# Altium PCB esc.PcbDoc (part 2 of 3)
Units mm, origin at the board's own origin, x right, y up, seen from the top; angles counter-clockwise.
Board outline 31 x 31 mm, 4 copper layers (Top Layer, Ground, Power, Bottom Layer), stack 0.971 mm thick; 336 components, 195 nets, 854 pads, 360 vias.
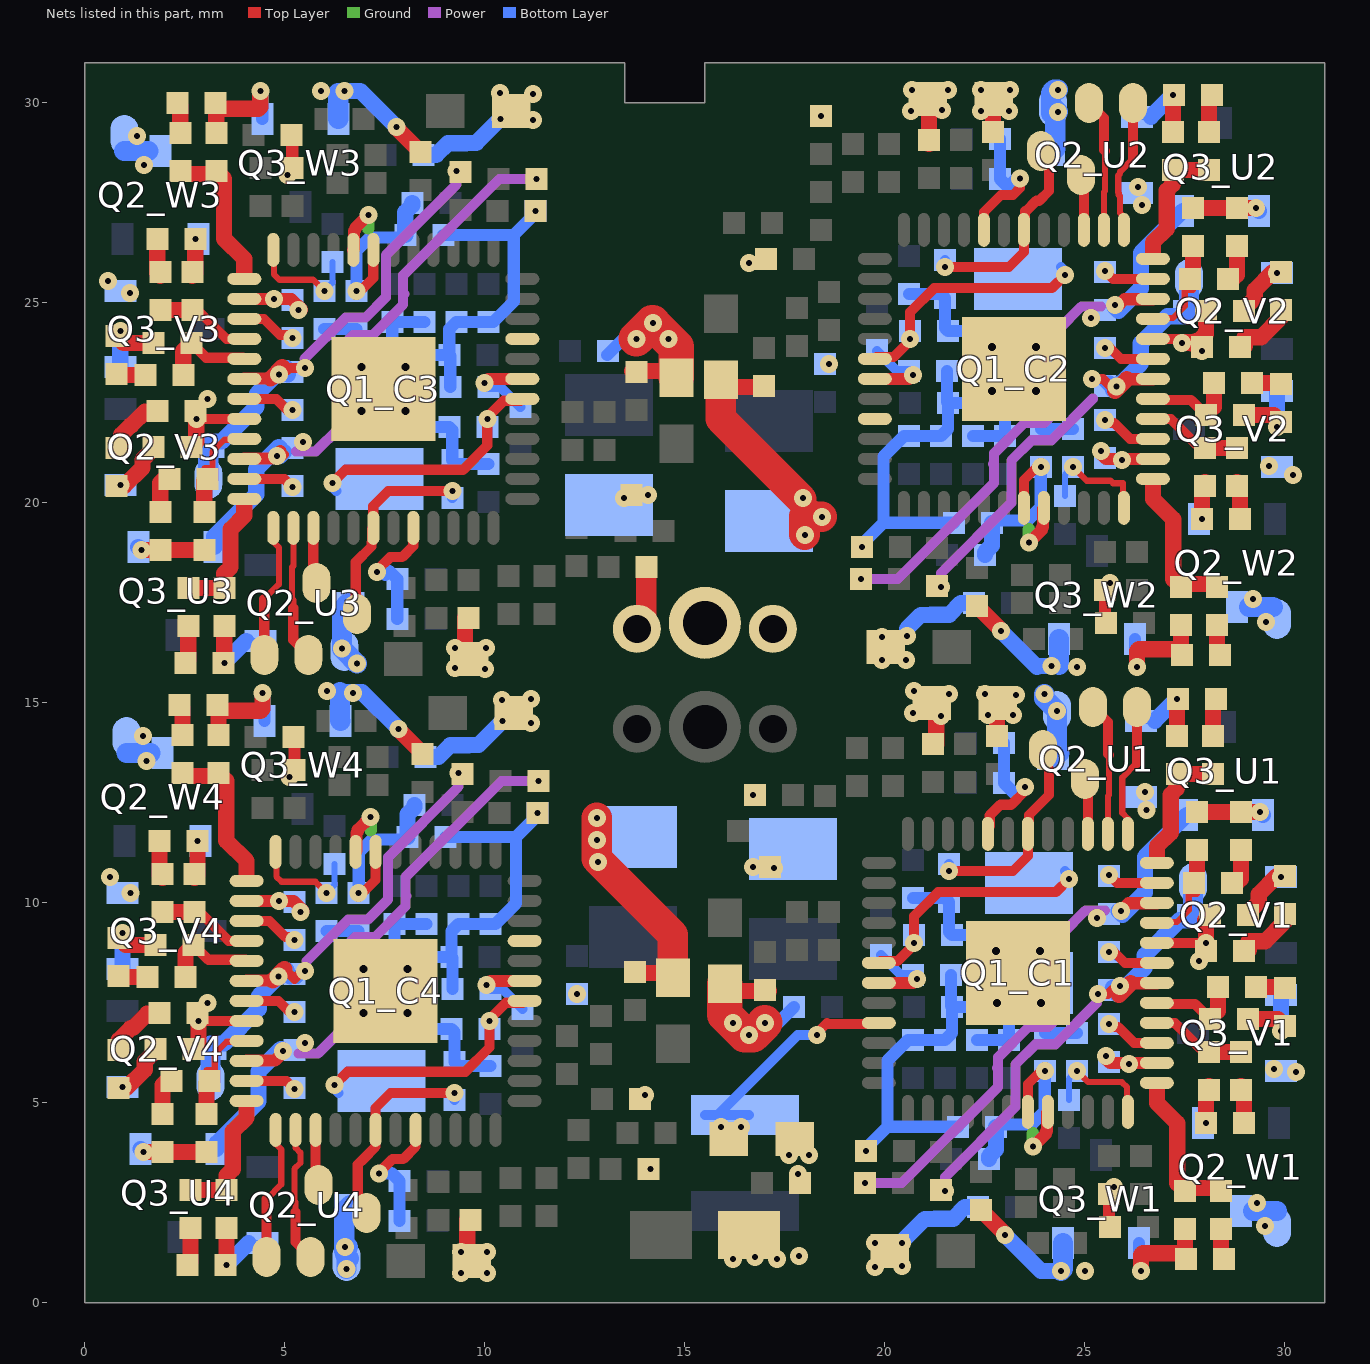
[diagram p4: the nets of this part, all layers, seen from the top]

## Via types
v1: diameter 0.45, hole 0.15, Top Layer to Bottom Layer, tented both sides, 344 vias
v2: diameter 0.5, hole 0.2, Top Layer to Bottom Layer, tented both sides, 12 vias
v3: diameter 0.5, hole 0.2, Top Layer to Bottom Layer, 4 vias

## Nets (pads, with @x,y where several pads share a name; then routed paths per layer and width w, separated by ;. In a path a pad name is that pad's centre, name@x,y a point inside that pad or via, vN(x,y) a via of type N, cw(c..) or ccw(c..) an arc to the next point about the centre after c; other vN are vias at no path point)
GND: C1_C1.1 C1_C2.1 C1_C3.1 C1_C4.1 C2_C1.2 C2_C2.2 C2_C3.2 C2_C4.2 C4_C1.2 C4_C2.2 C4_C3.2 C4_C4.2 C5_C1.1 C5_C2.1 C5_C3.1 C5_C4.1 C6_C1.1 C6_C2.1 C6_C3.1 C6_C4.1 C8_C1.2 C8_C2.2 C8_C3.2 C8_C4.2 C10_C1.2 C10_C2.2 C10_C3.2 C10_C4.2 C11_C1.1 C11_C2.1 C11_C3.1 C11_C4.1 C12_C1.2 C12_C2.2 C12_C3.2 C12_C4.2 C13_C1.2 C13_C2.2 C13_C3.2 C13_C4.2 C14_C1.2 C14_C2.2 C14_C3.2 C14_C4.2 C15_C1.2 C15_C2.2 C15_C3.2 C15_C4.2 C17_U1.2 C17_U2.2 C17_U3.2 C17_U4.2 C17_V1.2 C17_V2.2 C17_V3.2 C17_V4.2 C17_W1.2 C17_W2.2 C17_W3.2 C17_W4.2 C18_U1.1 C18_U2.1 C18_U3.1 C18_U4.1 C18_V1.1 C18_V2.1 C18_V3.1 C18_V4.1 C18_W1.1 C18_W2.1 C18_W3.1 C18_W4.1 C20.2 C21.2 C22.2 C23.1 D3.1 G.1 Q1_C1.20 Q1_C1.44 Q1_C1.EPAD Q1_C2.20 Q1_C2.44 Q1_C2.EPAD Q1_C3.20 Q1_C3.44 Q1_C3.EPAD Q1_C4.20 Q1_C4.44 Q1_C4.EPAD R5_U1.1 R5_U2.1 R5_U3.1 R5_U4.1 R5_V1.1 R5_V2.1 R5_V3.1 R5_V4.1 R5_W1.1 R5_W2.1 R5_W3.1 R5_W4.1 R6_C1.1 R6_C2.1 R6_C3.1 R6_C4.1 R7_C1.1 R7_C2.1 R7_C3.1 R7_C4.1 R10_C1.2 R10_C2.2 R10_C3.2 R10_C4.2 R13_C1.2 R13_C2.2 R13_C3.2 R13_C4.2 R16_C1.1 R16_C2.1 R16_C3.1 R16_C4.1 R19_U1.1 R19_U2.1 R19_U3.1 R19_U4.1 R19_V1.1 R19_V2.1 R19_V3.1 R19_V4.1 R19_W1.1 R19_W2.1 R19_W3.1 R19_W4.1 | length 117.5
  Top Layer w0.254: v1(7.307,18.273) 7.307,18.322 7.63,18.645 7.93,18.645 8.21,18.925 Q1_C3.44@8.21,19.375 ; v1@7.445,3.354 7.687,3.595 7.955,3.595 8.266,3.907 Q1_C4.44@8.266,4.325 ; R19_U3.1@9.503,17.143 R19_U3.1@9.585,17.225 ; R19_U4.1@9.56,2.093 R19_U4.1@9.641,2.175 ; R19_U1.1@21.2,13.875 R19_U1.1@21.282,13.957 ; Q1_C2.44@22.475,26.825 22.475,27.275 22.9,27.7 23.2,27.7 23.378,27.878 v1(23.378,28.108) ; Q1_C1.44@22.575,11.725 22.575,11.875 22.62,11.92 22.62,12.188 22.887,12.455 23.155,12.455 23.5,12.8 v1(23.5,12.9)
  Top Layer w0.305: C18_W3.1@5.16,29.2 5.185,29.175 C17_W3.2@5.185,28.375 ; C18_W4.1@5.216,14.15 5.241,14.125 C17_W4.2@5.241,13.325 ; Q1_C3.20@6.71,26.325 6.729,26.345 6.729,26.799 6.765,26.834 6.765,26.88 7.081,27.196 7.084,27.192 v1(7.088,27.192) ; Q1_C4.20@6.766,11.275 6.786,11.295 6.786,11.749 6.822,11.784 6.822,11.83 7.137,12.146 7.141,12.142 v1(7.145,12.142) ; G.1@15.4,16.6 G.1@15.6,16.4 ; D3.1@17.75,4.1 D3.1@18.05,3.8 ; v1(23.596,19.008) 23.6,19.008 23.604,19.004 23.92,19.32 23.92,19.366 23.955,19.401 23.955,19.855 Q1_C2.20@23.975,19.875 ; v1(23.696,3.908) 23.7,3.908 23.704,3.904 24.02,4.22 24.02,4.266 24.055,4.301 24.055,4.755 Q1_C1.20@24.075,4.775 ; C17_W2.2@25.5,17.825 25.5,17.025 C18_W2.1@25.525,17 ; C17_W1.2@25.6,2.725 25.6,1.925 C18_W1.1@25.625,1.9
  Top Layer w0.406: R5_U3.1@9.503,16.1 R19_U3.1@9.503,17.143 ; R5_U4.1@9.56,1.05 R19_U4.1@9.56,2.093 ; R19_V3.1@13.685,23.3 R5_V3.1@14.41,23.3 ; R19_V4.1@13.741,8.25 R5_V4.1@14.466,8.25 ; R5_V2.1@16.275,22.9 R19_V2.1@17,22.9 ; R5_V1.1@16.375,7.8 R19_V1.1@17.1,7.8 ; R19_U2.1@21.1,28.975 21.1,29.818 21.182,29.9 R5_U2.1@21.182,30.1 ; R19_U1.1@21.282,13.957 R5_U1.1@21.282,15
  Top Layer w0.508: C21.2@14.035,17.085 C18_V3.1@14.035,18.4
  Top Layer w0.762: v1(12.8,12.125) v1(12.8,11.575) 12.8,11.1 14.7,9.2 R5_V4.1@14.7,8.125 ; R5_V2.1@15.9,23.075 15.9,22.1 v1@17.913,20.087 ; v1(18,19.2) 17.979,19.221 17.979,19.665 18.2,19.675 v1(18.425,19.65)
  Top Layer w0.889: v1(13.785,24.1) 14.185,24.5 v1(14.2,24.5) 14.2,24.485 v1(14.585,24.1) 14.785,23.9 R5_V3.1@14.785,23.125 ; R5_V1.1@16,7.975 16,7.2 v1(16.2,7) 16.5,6.7 v1(16.6,6.7) 16.7,6.7 v1(17,7)
  Ground w0.305: 7.085,26.859 7.088,26.863 v1(7.088,27.192) ; 7.141,11.809 7.145,11.813 v1(7.145,12.142) ; v1(23.596,19.008) 23.596,19.337 23.6,19.341 ; v1(23.696,3.908) 23.696,4.237 23.7,4.241
  Bottom Layer w0.305: C14_C3.2@5.985,24.35 C15_C3.2@6.785,24.35 6.785,23.7 C4_C3.2@6.885,23.6 ; C14_C4.2@6.041,9.3 C15_C4.2@6.841,9.3 6.841,8.65 C4_C4.2@6.941,8.55 ; v1(7.307,18.273) 7.372,18.338 7.51,18.2 7.61,18.3 C17_U3.2@7.81,18.1 C18_U3.1@7.81,17.1 ; v1(7.35,3.241) 7.658,3.241 7.666,3.25 C17_U4.2@7.866,3.05 C18_U4.1@7.866,2.05 ; v2(8.01,22.3) 8.41,21.9 C6_C3.1@9.11,21.9 9.185,21.825 R7_C3.1@9.185,21.075 9.285,20.975 C1_C3.1@10.085,20.975 ; v2(8.066,7.25) 8.466,6.85 C6_C4.1@9.166,6.85 9.241,6.775 R7_C4.1@9.241,6.025 9.341,5.925 C1_C4.1@10.141,5.925 ; C11_C3.1@8.485,24.525 R13_C3.2@7.685,24.525 7.685,23.9 7.985,23.6 8.085,23.7 C10_C3.2@9.11,23.7 ; C11_C4.1@8.541,9.475 R13_C4.2@7.741,9.475 7.741,8.85 8.041,8.55 8.141,8.65 C10_C4.2@9.166,8.65 ; R16_C3.1@8.96,26.7 8.96,26.695 10.721,26.695 ; R16_C4.1@9.016,11.65 9.016,11.645 10.778,11.645 ; C8_C3.2@9.135,22.9 9.135,23.675 C10_C3.2@9.11,23.7 ; C8_C4.2@9.191,7.85 9.191,8.625 C10_C4.2@9.166,8.65 ; v1(11.26,27.3) 11.26,27.233 10.721,26.695 ; v1(11.316,12.25) 11.316,12.183 10.778,11.645 ; C12_C3.2@13.06,23.7 13.46,24.1 v1(13.785,24.1) ; v1(17,7) 17.325,7 C12_C1.2@17.725,7.4 ; v1(19.425,18.9) 19.425,18.967 19.963,19.505 ; v1(19.525,3.8) 19.525,3.867 20.063,4.405 ; C1_C2.1@20.6,25.225 21.4,25.225 R7_C2.1@21.5,25.125 21.5,24.375 C6_C2.1@21.575,24.3 22.275,24.3 v3(22.675,23.9) ; C1_C1.1@20.7,10.125 21.5,10.125 R7_C1.1@21.6,10.025 21.6,9.275 C6_C1.1@21.675,9.2 22.375,9.2 v2(22.775,8.8) ; C8_C2.2@21.55,23.3 21.55,22.525 C10_C2.2@21.575,22.5 ; C8_C1.2@21.65,8.2 21.65,7.425 C10_C1.2@21.675,7.4 ; R16_C2.1@21.725,19.5 21.725,19.505 19.963,19.505 ; R16_C1.1@21.825,4.4 21.825,4.405 20.063,4.405 ; C11_C2.1@22.2,21.675 R13_C2.2@23,21.675 23,22.3 22.7,22.6 22.6,22.5 C10_C2.2@21.575,22.5 ; C11_C1.1@22.3,6.575 R13_C1.2@23.1,6.575 23.1,7.2 v2(22.8,7.5) 22.7,7.4 C10_C1.2@21.675,7.4 ; C18_U2.1@22.875,29.1 C17_U2.2@22.875,28.1 23.075,27.9 23.283,28.108 v1(23.378,28.108) ; C18_U1.1@22.975,14 C17_U1.2@22.975,13 23.275,12.7 23.475,12.9 v1(23.5,12.9) ; C4_C2.2@23.8,22.6 23.9,22.5 C15_C2.2@23.9,21.85 C14_C2.2@24.7,21.85 ; v2(23.9,7.5) 24,7.4 C15_C1.2@24,6.75 C14_C1.2@24.8,6.75 ; C10_C3.2@9.11,23.7 9.11,24.35 R10_C3.2@9.285,24.525 C5_C3.1@10.085,24.525 10.21,24.525 10.721,25.037 10.721,26.695 ; C10_C4.2@9.166,8.65 9.166,9.3 R10_C4.2@9.341,9.475 C5_C4.1@10.141,9.475 10.266,9.475 10.778,9.987 10.778,11.645 ; 19.963,19.505 19.963,21.163 20.475,21.675 C5_C2.1@20.6,21.675 R10_C2.2@21.4,21.675 21.575,21.85 C10_C2.2@21.575,22.5 ; 20.063,4.405 20.063,6.063 20.575,6.575 C5_C1.1@20.7,6.575 R10_C1.2@21.5,6.575 21.675,6.75 C10_C1.2@21.675,7.4
  Bottom Layer w0.406: R19_W3.1@8.46,28.7 8.785,28.7 9.079,28.994 9.536,28.994 9.542,29 9.785,29 v1(10.385,29.6) ; R19_W4.1@8.516,13.65 8.841,13.65 9.135,13.944 9.592,13.944 9.598,13.95 9.841,13.95 v1(10.441,14.55) ; v1(20.425,1.5) 20.425,1.525 21,2.1 21.243,2.1 21.249,2.106 21.706,2.106 22,2.4 R19_W1.1@22.325,2.4 ; v1(20.55,16.675) 20.55,16.85 20.9,17.2 21.143,17.2 21.149,17.206 21.606,17.206 21.9,17.5 R19_W2.1@22.225,17.5
  other v1: 9.4,0.75 10.05,0.75 19.75,0.9 20.425,0.925 16.2,1.1 17.3,1.1 16.75,1.15 17.85,1.175 9.4,1.275 10.05,1.275 19.75,1.5 25.722,2.897 17.825,3.225 14.141,3.35 17.6,3.7 18.1,3.7 14,5.2 12.3,7.725 17.225,10.875 16.7,10.9 12.825,11.025 16.7,12.7 5.119,13.153 11.15,14.5 21.4,14.675 20.7,14.75 10.425,15.075 11.15,15.1 21.6,15.225 20.725,15.3 10,15.85 9.25,15.875 19.925,16.075 20.525,16.075 9.25,16.375 10.025,16.375 19.925,16.65 25.622,17.997 13.475,20.125 17.95,20.125 14.075,20.2 18.6,23.475 16.6,26 5.062,28.203 11.2,29.575 18.4,29.675 20.65,29.8 21.425,29.825 11.2,30.225 10.375,30.25 20.675,30.325 21.575,30.325
  other v2: 6.966,7.25 6.966,8.35 8.066,8.35 23.875,8.8 6.91,22.3 6.91,23.4 8.01,23.4
  other v3: 22.675,22.8 23.775,22.8 23.775,23.9
NetBT_C1_1: BT_C1.1 Q1_C1.42 R7_C1.2 | length 5.1
  Top Layer w0.254: v1(21.6,10.8) 23.2,10.8 23.575,11.175 Q1_C1.42@23.575,11.725 ; Q1_C1.42@23.6,11.75 23.6,12.2 24.1,12.7 24.1,13.35 BT_C1.1@23.8,13.65
  Bottom Layer w0.254: v1(21.6,10.8) R7_C1.2@21.6,10.975
NetBT_C2_1: BT_C2.1 Q1_C2.42 R7_C2.2 | length 5.6
  Top Layer w0.152: Q1_C2.42@23.475,26.825 Q1_C2.42@23.5,26.85 ; BT_C2.1@23.7,28.75 BT_C2.1@23.7,29.1
  Top Layer w0.254: v1(21.5,25.9) 23.1,25.9 23.475,26.275 Q1_C2.42@23.475,26.825 ; Q1_C2.42@23.5,26.85 23.5,27.3 23.532,27.3 23.787,27.555 23.855,27.555 24.1,27.8 24.1,28.6 BT_C2.1@23.9,28.8
  Bottom Layer w0.254: v1(21.5,25.9) R7_C2.2@21.5,26.075
NetBT_C3_1: BT_C3.1 Q1_C3.42 R7_C3.2 | length 5.4
  Top Layer w0.152: BT_C3.1@6.985,17.1 BT_C3.1@6.985,17.45 ; Q1_C3.42@7.185,19.35 Q1_C3.42@7.21,19.375
  Top Layer w0.254: BT_C3.1@6.985,17.45 6.77,17.664 6.77,18.517 7.164,18.912 7.164,19.014 7.181,19.03 7.185,19.03 Q1_C3.42@7.185,19.35 ; Q1_C3.42@7.21,19.375 7.21,19.925 7.585,20.3 v1(9.185,20.3)
  Bottom Layer w0.254: R7_C3.2@9.185,20.125 v1(9.185,20.3)
NetBT_C4_1: BT_C4.1 Q1_C4.42 R7_C4.2 | length 5.4
  Top Layer w0.152: BT_C4.1@6.841,2.6 7.041,2.4 BT_C4.1@7.041,2.25 BT_C4.1@7.041,2.05
  Top Layer w0.254: BT_C4.1@6.841,2.6 6.82,2.621 6.82,3.461 6.955,3.595 7.266,3.907 7.266,4.875 7.641,5.25 v1(9.241,5.25)
  Bottom Layer w0.254: R7_C4.2@9.241,5.075 v1(9.241,5.25)
NetC3_C1_1: C3_C1.1 Q1_C1.35 | length 1.3
  Top Layer w0.254: v1(25.6,10.7) 25.8,10.5 Q1_C1.35@26.8,10.5
NetC3_C1_2: C3_C1.2 Q1_C1.34 Q2_U1.D Q3_U1.S R8_C1.1 U_C1.1 | length 16.6
  Top Layer w0.305: v1(25.9,9.8) 26.092,9.992 Q1_C1.34@26.8,9.992
  Power w0.254: v1(19.5,3) 20.424,3 22.83,5.406 22.83,5.844 22.8,5.874 22.83,5.904 22.83,6.14 23.589,6.9 24.085,6.9 24.455,7.27 24.455,8.945 24.43,8.97 24.43,9.23 25.011,9.811 25.5,9.811
  Bottom Layer w0.406: v1(25.9,9.8) 25.839,9.8 25.939,9.7 26.5,10.261 26.5,11.15 Q3_U1.S@27.55,12.2
  Bottom Layer w0.508: v1(23.983,15.221) 23.983,15.117 v1(24.3,14.8) 24.3,13.814 24.357,13.757 Q2_U1.D@24.2,13.6
  other v1: 25.3,9.625
NetC3_C2_1: C3_C2.1 Q1_C2.35 | length 1.3
  Top Layer w0.254: v1(25.5,25.8) 25.7,25.6 Q1_C2.35@26.7,25.6
NetC3_C2_2: C3_C2.2 Q1_C2.34 Q2_U2.D Q3_U2.S R8_C2.1 U_C2.1 | length 17.1
  Top Layer w0.254: v1(25.75,24.95) v1@25.8,24.9
  Top Layer w0.305: v1@25.8,24.9 25.992,25.092 Q1_C2.34@26.7,25.092
  Power w0.254: v1(19.4,18.1) 20.324,18.1 22.73,20.506 22.73,20.944 22.7,20.974 22.73,21.004 22.73,21.24 23.489,22 23.985,22 24.355,22.37 24.355,24.045 24.33,24.07 24.33,24.33 24.911,24.911 25.4,24.911
  Bottom Layer w0.406: v1(25.75,24.95) 25.75,24.911 25.739,24.9 25.839,24.8 26.4,25.361 26.4,26.25 Q3_U2.S@27.45,27.3
  Bottom Layer w0.508: Q2_U2.D@24.1,28.7 24.257,28.857 U_C2.1@24.257,29.776 ; U_C2.1@24.15,29.736 24.19,29.776 U_C2.1@24.257,29.776 ; v1(24.325,29.776) U_C2.1@24.257,29.776 ; v1(24.325,30.326) 24.226,30.326 24.15,30.25 24.15,29.737 24.257,29.843 U_C2.1@24.257,29.776
  other v1: 25.15,24.625
NetC3_C3_1: C3_C3.1 Q1_C3.35 | length 1.3
  Top Layer w0.254: Q1_C3.35@3.985,20.6 4.985,20.6 v1(5.185,20.4)
NetC3_C3_2: C3_C3.2 Q1_C3.34 Q2_U3.D Q3_U3.S R8_C3.1 U_C3.1 | length 17.1
  Top Layer w0.254: v1(4.8,21.175) 4.94,21.175 4.975,21.21 v1@4.885,21.3
  Top Layer w0.305: Q1_C3.34@3.985,21.108 4.693,21.108 v1@4.885,21.3
  Power w0.254: 5.285,21.289 5.774,21.289 6.355,21.87 6.355,22.13 6.33,22.155 6.33,23.83 6.7,24.2 7.195,24.2 7.955,24.96 7.955,25.196 7.985,25.226 7.955,25.256 7.955,25.694 10.36,28.1 v1(11.285,28.1)
  Bottom Layer w0.406: Q3_U3.S@3.235,18.9 3.235,19.16 4.285,20.21 4.285,20.839 4.846,21.4 4.975,21.271 4.879,21.175 v1(4.8,21.175)
  Bottom Layer w0.508: Q2_U3.D@6.585,17.5 6.428,17.343 v1(6.428,16.357) U_C3.1@6.485,16.3 v1(6.8,15.985)
  other v1: 5.45,21.525
NetC3_C4_1: C3_C4.1 Q1_C4.35 | length 1.3
  Top Layer w0.254: Q1_C4.35@4.041,5.55 5.041,5.55 v1(5.241,5.35)
NetC3_C4_2: C3_C4.2 Q1_C4.34 Q2_U4.D Q3_U4.S R8_C4.1 U_C4.1 | length 16.8
  Top Layer w0.254: v1@4.941,6.25 4.953,6.261 v1(4.953,6.3)
  Top Layer w0.305: Q1_C4.34@4.041,6.058 4.749,6.058 v1@4.941,6.25
  Power w0.254: 5.341,6.239 5.831,6.239 6.412,6.82 6.412,7.08 6.387,7.105 6.387,8.78 6.757,9.15 7.252,9.15 8.012,9.91 8.012,10.146 8.041,10.176 8.012,10.206 8.012,10.644 10.417,13.05 v1(11.341,13.05)
  Bottom Layer w0.406: Q3_U4.S@3.291,3.85 3.291,3.991 4.341,5.041 4.341,5.789 4.903,6.35 v1(4.953,6.3)
  Bottom Layer w0.508: v1(6.541,0.85) U_C4.1@6.541,1.05 6.6,1.109 6.5,1.209 U_C4.1@6.5,1.322 ; Q2_U4.D@6.641,2.45 6.485,2.293 6.485,1.307 U_C4.1@6.5,1.322 ; U_C4.1@6.5,1.322 v1(6.5,1.4) 6.578,1.4 U_C4.1@6.5,1.322
  other v1: 5.5,6.5
NetC4_C1_1: C4_C1.1 C6_C1.2 Q1_C1.6 | length 6.3
  Top Layer w0.254: Q1_C1.6@19.85,8.5 19.895,8.545 20.313,8.545 20.725,8.957 v1(20.725,9) 20.725,9.665 21.33,10.27 24.27,10.27 v1(24.6,10.6)
  Bottom Layer w0.254: C4_C1.1@24.5,10.8 24.6,10.7 v1(24.6,10.6)
NetC4_C2_1: C4_C2.1 C6_C2.2 Q1_C2.6 | length 6.3
  Top Layer w0.254: Q1_C2.6@19.75,23.6 19.795,23.645 20.213,23.645 20.625,24.057 v1(20.625,24.1) 20.625,24.765 21.23,25.37 24.17,25.37 v1(24.5,25.7)
  Bottom Layer w0.254: C4_C2.1@24.4,25.9 24.5,25.8 v1(24.5,25.7)
NetC4_C3_1: C4_C3.1 C6_C3.2 Q1_C3.6 | length 6.3
  Top Layer w0.254: v1(6.185,20.5) 6.514,20.83 9.455,20.83 10.06,21.435 v1(10.06,22.1) 10.06,22.143 10.471,22.555 10.889,22.555 Q1_C3.6@10.935,22.6
  Bottom Layer w0.254: v1(6.185,20.5) 6.185,20.4 C4_C3.1@6.285,20.3
NetC4_C4_1: C4_C4.1 C6_C4.2 Q1_C4.6 | length 6.3
  Top Layer w0.254: v1(6.241,5.45) 6.571,5.78 9.512,5.78 10.116,6.385 v1(10.116,7.05) 10.116,7.093 10.528,7.505 10.946,7.505 Q1_C4.6@10.991,7.55
  Bottom Layer w0.254: v1(6.241,5.45) 6.241,5.35 C4_C4.1@6.341,5.25
NetC7_C1_1: C7_C1.1 Q1_C1.31 | length 1.6
  Top Layer w0.254: v1(25.6,8.775) 25.725,8.775 26,8.5 Q1_C1.31@26.8,8.5
  Bottom Layer w0.254: v1(25.6,8.775) 25.7,8.775 C7_C1.1@25.8,8.675
NetC7_C1_2: C7_C1.2 Q1_C1.30 Q2_V1.D Q3_V1.S R9_C1.2 V_C1.1 | length 13
  Top Layer w0.254: v1(25.325,7.725) 25.576,7.725 25.676,7.825 25.751,7.75 25.776,7.775 25.851,7.7
  Top Layer w0.305: 26.143,7.992 Q1_C1.30@26.8,7.992
  Top Layer w0.406: 25.851,7.7 26.143,7.992
  Power w0.254: v1(21.5,2.8) 21.5,3.143 23.262,4.905 23.262,5.962 23.768,6.468 24.263,6.468 v1@25.298,7.502
  Bottom Layer w0.254: v1(25.325,7.725) 25.5,7.725 C7_C1.2@25.6,7.825 25.675,7.75 25.7,7.775 25.775,7.7 25.8,7.725 25.875,7.8 v1@25.969,7.894 ; Q2_V1.D@27.7,9.564 Q2_V1.D@27.7,9.7 Q2_V1.D@27.7,9.8
  Bottom Layer w0.406: C7_C1.2@25.713,7.878 25.708,7.886 25.8,7.794 C7_C1.2@25.8,7.725 ; v1@25.875,7.8 v1(25.875,7.925) ; v1@25.969,7.894 26.007,7.893 26.456,8.342 26.456,8.356 26.494,8.394 26.494,8.694 27.364,9.564 Q2_V1.D@27.7,9.564
  Bottom Layer w0.508: Q2_V1.D@27.7,9.8 V_C1.1@27.7,10.5
  other v1: 30.275,5.775 29.725,5.85
NetC7_C2_1: C7_C2.1 Q1_C2.31 | length 1.6
  Top Layer w0.254: v1(25.5,23.875) 25.625,23.875 25.9,23.6 Q1_C2.31@26.7,23.6
  Bottom Layer w0.254: v1(25.5,23.875) 25.6,23.875 C7_C2.1@25.7,23.775
NetC7_C2_2: C7_C2.2 Q1_C2.30 Q2_V2.D Q3_V2.S R9_C2.2 V_C2.1 | length 13.1
  Top Layer w0.254: v1(25.175,23.1) 25.451,23.1 v1@25.751,22.8
  Top Layer w0.305: 26.043,23.092 Q1_C2.30@26.7,23.092
  Top Layer w0.406: v1@25.751,22.8 26.043,23.092
  Power w0.254: v1(21.4,17.9) 21.4,18.243 23.162,20.005 23.162,21.062 23.668,21.568 24.163,21.568 25.198,22.602
  Bottom Layer w0.254: v1(25.175,23.1) 25.375,23.1 25.675,22.8 25.7,22.825 v1(25.784,22.909) v1@25.869,22.994 ; Q2_V2.D@27.6,24.664 Q2_V2.D@27.6,24.8 Q2_V2.D@27.6,24.9
  Bottom Layer w0.406: C7_C2.2@25.613,22.978 25.608,22.986 25.7,22.894 C7_C2.2@25.7,22.825 ; v1@25.869,22.994 25.907,22.993 26.356,23.442 26.356,23.456 26.394,23.494 26.394,23.994 27.064,24.664 Q2_V2.D@27.6,24.664
  Bottom Layer w0.508: Q2_V2.D@27.6,24.9 V_C2.1@27.6,25.6
  other v1: 30.2,20.7 29.6,20.925
NetC7_C3_1: C7_C3.1 Q1_C3.31 | length 1.6
  Top Layer w0.254: Q1_C3.31@3.985,22.6 4.785,22.6 5.06,22.325 v1(5.185,22.325)
  Bottom Layer w0.254: C7_C3.1@4.985,22.425 5.085,22.325 v1(5.185,22.325)
NetC7_C3_2: C7_C3.2 Q1_C3.30 Q2_V3.D Q3_V3.S R9_C3.2 V_C3.1 | length 13.1
  Top Layer w0.254: v1@4.934,23.4 4.959,23.425 5.06,23.325 5.11,23.375 v1(5.5,23.375)
  Top Layer w0.305: Q1_C3.30@3.985,23.108 4.642,23.108
  Top Layer w0.406: 4.642,23.108 v1@4.934,23.4
  Power w0.254: v1@5.487,23.598 6.521,24.632 7.016,24.632 7.523,25.138 7.523,26.195 9.285,27.957 v1(9.285,28.3)
  Bottom Layer w0.254: Q2_V3.D@3.085,21.3 Q2_V3.D@3.085,21.4 Q2_V3.D@3.085,21.536 ; v1@4.816,23.206 4.985,23.375 5.06,23.45 5.185,23.325 5.235,23.375 v1(5.5,23.375)
  Bottom Layer w0.406: Q2_V3.D@3.085,21.536 3.421,21.536 4.291,22.406 4.291,22.706 4.329,22.744 4.329,22.758 4.778,23.207 v1@4.816,23.206 ; v1(4.846,23.206) C7_C3.2@4.985,23.344 ; C7_C3.2@5.072,23.222 5.077,23.214 4.985,23.306 C7_C3.2@4.985,23.344 ; C7_C3.2@4.985,23.344 4.985,23.375 5,23.36 C7_C3.2@4.985,23.344
  Bottom Layer w0.508: V_C3.1@3.085,20.6 Q2_V3.D@3.085,21.3
  other v1: 1.125,25.25 0.575,25.55
NetC7_C4_1: C7_C4.1 Q1_C4.31 | length 1.6
  Top Layer w0.254: Q1_C4.31@4.041,7.55 4.841,7.55 5.116,7.275 v1(5.241,7.275)
  Bottom Layer w0.254: C7_C4.1@5.041,7.375 5.141,7.275 v1(5.241,7.275)
NetC7_C4_2: C7_C4.2 Q1_C4.30 Q2_V4.D Q3_V4.S R9_C4.2 V_C4.1 | length 13
  Top Layer w0.254: 4.991,8.35 5.241,8.1 5.441,8.3 v1(5.5,8.3)
  Top Layer w0.305: Q1_C4.30@4.041,8.058 v1@4.699,8.058
  Top Layer w0.406: v1@4.699,8.058 4.991,8.35
  Power w0.254: 5.544,8.548 6.578,9.582 7.073,9.582 7.58,10.088 7.58,11.145 9.341,12.907 v1(9.341,13.25)
  Bottom Layer w0.254: Q2_V4.D@3.141,6.25 Q2_V4.D@3.141,6.35 Q2_V4.D@3.141,6.486 ; v1@4.873,8.157 5.041,8.325 5.066,8.35 5.316,8.1 5.5,8.284 v1(5.5,8.3)
  Bottom Layer w0.406: Q2_V4.D@3.141,6.486 3.478,6.486 4.347,7.356 4.347,7.656 4.385,7.694 4.385,7.708 v1(4.835,8.157) ; v1@4.873,8.156 v1(4.835,8.157) ; v1@4.873,8.157 v1(4.835,8.157) ; C7_C4.2@5.041,8.325 5.041,8.256 5.134,8.164 C7_C4.2@5.129,8.172
  Bottom Layer w0.508: V_C4.1@3.141,5.55 Q2_V4.D@3.141,6.25
  other v1: 1.141,10.25 0.625,10.65
NetC8_C1_1: C8_C1.1 Q1_C1.7 R11_C1.2 | length 2.1
  Top Layer w0.305: Q1_C1.7@19.85,8 20.7,8 v1(20.8,8.1)
  Bottom Layer w0.254: R11_C1.2@19.9,8.7 20.4,8.2 C8_C1.1@20.7,8.2 v1(20.8,8.1)
NetC8_C2_1: C8_C2.1 Q1_C2.7 R11_C2.2 | length 2.1
  Top Layer w0.305: Q1_C2.7@19.75,23.1 20.6,23.1 v1(20.7,23.2)
  Bottom Layer w0.254: R11_C2.2@19.8,23.8 20.3,23.3 C8_C2.1@20.6,23.3 v1(20.7,23.2)
NetC8_C3_1: C8_C3.1 Q1_C3.7 R11_C3.2 | length 2.1
  Top Layer w0.305: v1(9.985,23) 10.085,23.1 Q1_C3.7@10.935,23.1
  Bottom Layer w0.254: v1(9.985,23) C8_C3.1@10.085,22.9 10.385,22.9 R11_C3.2@10.885,22.4
NetC8_C4_1: C8_C4.1 Q1_C4.7 R11_C4.2 | length 2.1
  Top Layer w0.305: v1(10.041,7.95) 10.141,8.05 Q1_C4.7@10.991,8.05
  Bottom Layer w0.254: v1(10.041,7.95) C8_C4.1@10.141,7.85 10.441,7.85 R11_C4.2@10.941,7.35
NetC9_C1_1: C9_C1.1 Q1_C1.27 | length 1.4
  Top Layer w0.254: v1(25.6,6.975) 25.6,6.9 25.831,6.9 26.231,6.5 Q1_C1.27@26.8,6.5
NetC9_C1_2: C9_C1.2 Q1_C1.26 Q2_W1.D Q3_W1.S R12_C1.2 W_C1.1 | length 5.6
  Top Layer w0.305: v1(25.525,6.175) 25.525,6.101 v1@25.55,6.075 ; v1@25.55,6.075 25.625,6 Q1_C1.26@26.8,6
  Top Layer w0.406: R12_C1.2@22.4,2.325 v1@23,1.725
  Bottom Layer w0.254: v1@29.2,2.3 29.3,2.4 v1(29.3,2.5)
  Bottom Layer w0.406: v1(23,1.7) 23.9,0.8 v1(24.4,0.8)
  Bottom Layer w0.508: v1(24.4,0.8) 24.45,0.85 Q3_W1.S@24.45,1.5 ; v1@29.2,2.3 W_C1.1@29.8,2.3
  other v1: 25,0.8 29.5,1.925 26.1,5.975
NetC9_C2_1: C9_C2.1 Q1_C2.27 | length 1.4
  Top Layer w0.254: v1(25.5,22.075) 25.5,22 25.731,22 26.131,21.6 Q1_C2.27@26.7,21.6
NetC9_C2_2: C9_C2.2 Q1_C2.26 Q2_W2.D Q3_W2.S R12_C2.2 W_C2.1 | length 5.4
  Top Layer w0.305: v1(25.4,21.3) 25.4,21.225 25.525,21.1 Q1_C2.26@26.7,21.1
  Top Layer w0.406: R12_C2.2@22.3,17.425 v1@22.9,16.825
  Bottom Layer w0.254: v1@29.1,17.4 29.2,17.5 v1(29.2,17.6)
  Bottom Layer w0.406: v1(22.9,16.8) 23.8,15.9 23.825,15.925 v1(24.17,15.925)
  Bottom Layer w0.508: v1@24.35,15.95 Q3_W2.S@24.35,16.6 ; v1@29.1,17.4 W_C2.1@29.7,17.4
  other v1: 24.8,15.9 29.525,17.025 25.925,21.075
NetC9_C3_1: C9_C3.1 Q1_C3.27 | length 1.4
  Top Layer w0.254: Q1_C3.27@3.985,24.6 4.475,24.6 4.875,24.2 5.185,24.2 v1(5.185,24.125)
NetC9_C3_2: C9_C3.2 Q1_C3.26 Q2_W3.D Q3_W3.S R12_C3.2 W_C3.1 | length 5.9
  Top Layer w0.305: Q1_C3.26@3.985,25.1 v1(4.725,25.1) 5.16,25.1 5.425,24.835 5.419,24.829 v1(5.336,24.829)
  Top Layer w0.406: v1@7.785,29.375 R12_C3.2@8.385,28.775
  Bottom Layer w0.254: v1(1.475,28.45) 1.475,28.61 1.435,28.65 1.585,28.8
  Bottom Layer w0.406: v1@6.385,30.3 6.885,30.3 v1(7.785,29.4)
  Bottom Layer w0.508: W_C3.1@0.985,28.8 1.585,28.8 ; Q3_W3.S@6.335,29.6 v1@6.335,30.25
  other v1: 1.3,29.175 5.9,30.3 6.492,30.3
NetC9_C4_1: C9_C4.1 Q1_C4.27 | length 1.4
  Top Layer w0.254: Q1_C4.27@4.041,9.55 4.61,9.55 5.01,9.15 5.241,9.15 v1(5.241,9.075)
NetC9_C4_2: C9_C4.2 Q1_C4.26 Q2_W4.D Q3_W4.S R12_C4.2 W_C4.1 | length 5.9
  Top Layer w0.305: Q1_C4.26@4.041,10.05 5.216,10.05 5.466,9.8 5.445,9.779 v1(5.393,9.779)
  Top Layer w0.406: v1@7.841,14.325 R12_C4.2@8.441,13.725
  Bottom Layer w0.254: v1(1.541,13.55) 1.541,13.65 v1@1.641,13.75
  Bottom Layer w0.406: 6.375,15.265 6.926,15.265 v1(7.841,14.35)
  Bottom Layer w0.508: W_C4.1@1.041,13.75 v1@1.641,13.75 ; 6.375,15.265 6.375,14.566 Q3_W4.S@6.391,14.55
  other v1: 4.85,10.05 1.45,14.175 6.7,15.25 6.05,15.3
NetC14_C1_1: C14_C1.1 Q1_C1.24 R15_C1.2 | length 2.9
  Top Layer w0.152: v1(24.8,5.8) 25.079,5.521 25.924,5.521 26.054,5.391 26.054,4.796 Q1_C1.24@26.075,4.775
  Bottom Layer w0.152: R15_C1.2@24.6,5.075 24.6,5.6 v1(24.8,5.8)
NetC14_C2_1: C14_C2.1 Q1_C2.24 R15_C2.2 | length 2.9
  Top Layer w0.152: v1(24.7,20.9) 25.046,20.554 25.642,20.554 25.705,20.491 25.954,20.491 25.954,19.896 Q1_C2.24@25.975,19.875
  Bottom Layer w0.152: R15_C2.2@24.5,20.175 24.5,20.7 v1(24.7,20.9)
NetC14_C3_1: C14_C3.1 Q1_C3.24 R15_C3.2 | length 2.9
  Top Layer w0.152: Q1_C3.24@4.71,26.325 4.731,26.304 4.731,25.709 4.861,25.579 5.706,25.579 v1(5.985,25.3)
  Bottom Layer w0.152: v1(5.985,25.3) 6.185,25.5 R15_C3.2@6.185,26.025
NetC14_C4_1: C14_C4.1 Q1_C4.24 R15_C4.2 | length 2.9
  Top Layer w0.152: Q1_C4.24@4.766,11.275 4.787,11.254 4.787,10.659 4.918,10.529 5.762,10.529 v1(6.041,10.25)
  Bottom Layer w0.152: v1(6.041,10.25) 6.241,10.45 R15_C4.2@6.241,10.975
NetC15_C1_1: C15_C1.1 Q1_C1.19 R14_C1.1 R16_C1.2 | length 4.7
  Top Layer w0.254: Q1_C1.19@23.575,4.775 23.575,5.475 24,5.9 v1(24,5.8)
  Bottom Layer w0.305: R16_C1.2@22.775,4.4 22.838,4.463 23.663,4.463 23.995,4.795 23.995,5.8 v1(24,5.8)
  Bottom Layer w0.406: R14_C1.1@22.6,3.6 22.6,3.661 22.775,3.836 R16_C1.2@22.775,4.4
NetC15_C2_1: C15_C2.1 Q1_C2.19 R14_C2.1 R16_C2.2 | length 4.7
  Top Layer w0.254: Q1_C2.19@23.475,19.875 23.475,20.575 23.9,21 v1(23.9,20.9)
  Bottom Layer w0.305: R16_C2.2@22.675,19.5 22.738,19.563 23.563,19.563 23.895,19.895 23.895,20.9 v1(23.9,20.9)
  Bottom Layer w0.406: R14_C2.1@22.5,18.7 22.5,18.761 22.675,18.936 R16_C2.2@22.675,19.5
NetC15_C3_1: C15_C3.1 Q1_C3.19 R14_C3.1 R16_C3.2 | length 4.7
  Top Layer w0.254: v1(6.785,25.3) 6.785,25.2 7.21,25.625 Q1_C3.19@7.21,26.325
  Bottom Layer w0.305: v1(6.785,25.3) 6.79,25.3 6.79,26.305 7.122,26.637 7.947,26.637 R16_C3.2@8.01,26.7
  Bottom Layer w0.406: R16_C3.2@8.01,26.7 8.01,27.264 8.185,27.439 R14_C3.1@8.185,27.5
NetC15_C4_1: C15_C4.1 Q1_C4.19 R14_C4.1 R16_C4.2 | length 4.7
  Top Layer w0.254: v1(6.841,10.25) 6.841,10.15 7.266,10.575 Q1_C4.19@7.266,11.275
  Bottom Layer w0.305: v1(6.841,10.25) 6.847,10.25 6.847,11.255 7.178,11.587 8.003,11.587 R16_C4.2@8.066,11.65
  Bottom Layer w0.406: R16_C4.2@8.066,11.65 8.066,12.214 8.241,12.389 R14_C4.1@8.241,12.45
NetCK_C1_1: CK_C1.1 Q1_C1.38 | length 3.4
  Top Layer w0.152: Q1_C1.38@25.575,11.725 25.575,12.671 25.604,12.7 25.604,13.7
  Top Layer w0.254: CK_C1.1@25.2,14.9 25.575,14.525 25.575,13.729 25.604,13.7
NetCK_C2_1: CK_C2.1 Q1_C2.38 | length 3.4
  Top Layer w0.152: Q1_C2.38@25.475,26.825 25.475,27.771 25.504,27.8 25.504,28.8
  Top Layer w0.254: CK_C2.1@25.1,30 25.475,29.625 25.475,28.829 25.504,28.8
NetCK_C3_1: CK_C3.1 Q1_C3.38 | length 3.4
  Top Layer w0.152: 5.21,17.371 5.21,17.571 5.181,17.6 5.181,18.4 5.21,18.429 Q1_C3.38@5.21,19.375
  Top Layer w0.254: 5.21,17.371 5.21,16.575 CK_C3.1@5.585,16.2
NetCK_C4_1: CK_C4.1 Q1_C4.38 | length 3.5
  Top Layer w0.152: 5.266,2.271 5.266,2.521 5.237,2.55 5.237,3.35 5.385,3.498 5.385,3.759 5.266,3.878 Q1_C4.38@5.266,4.325
  Top Layer w0.254: 5.266,2.271 5.266,1.525 CK_C4.1@5.641,1.15
NetD1_U1_1: D1_U1.1 Q3_U1.G R2_U1.2 | length 1.7
  Top Layer w0.406: R2_U1.2@27.8,12.275 D1_U1.1@28.9,12.275 v1(29.375,12.275)
  Bottom Layer w0.406: v1(29.375,12.275) Q3_U1.G@29.45,12.2
NetD1_U1_2: D1_U1.2 R1_U1.2 | length 0.9
  Top Layer w0.406: R1_U1.2@28.8,10.5 28.9,10.6 D1_U1.2@28.9,11.325
NetD1_U2_1: D1_U2.1 Q3_U2.G R2_U2.2 | length 1.7
  Top Layer w0.406: R2_U2.2@27.7,27.375 D1_U2.1@28.8,27.375 v1(29.275,27.375)
  Bottom Layer w0.406: v1(29.275,27.375) Q3_U2.G@29.35,27.3
NetD1_U2_2: D1_U2.2 R1_U2.2 | length 0.9
  Top Layer w0.406: R1_U2.2@28.7,25.6 28.8,25.7 D1_U2.2@28.8,26.425
NetD1_U3_1: D1_U3.1 Q3_U3.G R2_U3.2 | length 1.7
  Top Layer w0.406: v1(1.41,18.825) D1_U3.1@1.885,18.825 R2_U3.2@2.985,18.825
  Bottom Layer w0.406: Q3_U3.G@1.335,18.9 v1(1.41,18.825)
NetD1_U3_2: D1_U3.2 R1_U3.2 | length 0.9
  Top Layer w0.406: D1_U3.2@1.885,19.775 1.885,20.5 R1_U3.2@1.985,20.6
NetD1_U4_1: D1_U4.1 Q3_U4.G R2_U4.2 | length 1.7
  Top Layer w0.406: v1(1.466,3.775) D1_U4.1@1.941,3.775 R2_U4.2@3.041,3.775
  Bottom Layer w0.406: Q3_U4.G@1.391,3.85 v1(1.466,3.775)
NetD1_U4_2: D1_U4.2 R1_U4.2 | length 0.9
  Top Layer w0.406: D1_U4.2@1.941,4.725 1.941,5.45 R1_U4.2@2.041,5.55
NetD1_V1_1: D1_V1.1 Q3_V1.G R2_V1.2 | length 1.9
  Top Layer w0.406: R2_V1.2@29.075,7.1 29.825,7.1 D1_V1.1@30,6.925
  Bottom Layer w0.406: v1(29.9,6.8) Q3_V1.G@29.9,7.7
NetD1_V1_2: D1_V1.2 R1_V1.2 | length 0.7
  Top Layer w0.406: R1_V1.2@29.275,7.9 29.975,7.9 D1_V1.2@30,7.875
NetD1_V2_1: D1_V2.1 Q3_V2.G R2_V2.2 | length 1.9
  Top Layer w0.406: R2_V2.2@28.975,22.2 29.725,22.2 D1_V2.1@29.9,22.025
  Bottom Layer w0.406: v1(29.8,21.9) Q3_V2.G@29.8,22.8
NetD1_V2_2: D1_V2.2 R1_V2.2 | length 0.7
  Top Layer w0.406: R1_V2.2@29.175,23 29.875,23 D1_V2.2@29.9,22.975
NetD1_V3_1: D1_V3.1 Q3_V3.G R2_V3.2 | length 1.9
  Top Layer w0.406: D1_V3.1@0.785,24.175 0.96,24 R2_V3.2@1.71,24
  Bottom Layer w0.406: Q3_V3.G@0.885,23.4 v1(0.885,24.3)
NetD1_V3_2: D1_V3.2 R1_V3.2 | length 0.7
  Top Layer w0.406: D1_V3.2@0.785,23.225 0.81,23.2 R1_V3.2@1.51,23.2
NetD1_V4_1: D1_V4.1 Q3_V4.G R2_V4.2 | length 1.9
  Top Layer w0.406: D1_V4.1@0.841,9.125 1.016,8.95 R2_V4.2@1.766,8.95
  Bottom Layer w0.406: Q3_V4.G@0.941,8.35 v1(0.941,9.25)
NetD1_V4_2: D1_V4.2 R1_V4.2 | length 0.7
  Top Layer w0.406: D1_V4.2@0.841,8.175 0.866,8.15 R1_V4.2@1.566,8.15
NetD1_W1_1: D1_W1.1 Q3_W1.G R2_W1.2 | length 3
  Top Layer w0.406: v1(26.4,0.8) 26.4,1.2 26.444,1.244 D1_W1.1@27.5,1.244 ; R2_W1.2@27.5,1.85 D1_W1.1@27.5,1.244 ; D1_W1.1@27.525,1.1 27.5,1.125 D1_W1.1@27.5,1.244
  Bottom Layer w0.305: Q3_W1.G@26.35,1.5 26.35,0.85 v1(26.4,0.8)
NetD1_W1_2: D1_W1.2 R1_W1.2 | length 0.8
  Top Layer w0.406: R1_W1.2@28.4,1.85 28.4,1.175 D1_W1.2@28.475,1.1
NetD1_W2_1: D1_W2.1 Q3_W2.G R2_W2.2 | length 3
  Top Layer w0.406: v1(26.3,15.9) 26.3,16.3 26.344,16.344 D1_W2.1@27.4,16.344 ; R2_W2.2@27.4,16.95 D1_W2.1@27.4,16.344 ; D1_W2.1@27.425,16.2 27.4,16.225 D1_W2.1@27.4,16.344
  Bottom Layer w0.305: Q3_W2.G@26.25,16.6 26.25,15.95 v1(26.3,15.9)
NetD1_W2_2: D1_W2.2 R1_W2.2 | length 0.8
  Top Layer w0.406: R1_W2.2@28.3,16.95 28.3,16.275 D1_W2.2@28.375,16.2
NetD1_W3_1: D1_W3.1 Q3_W3.G R2_W3.2 | length 3
  Top Layer w0.406: D1_W3.1@3.26,30 3.285,29.975 D1_W3.1@3.285,29.856 ; R2_W3.2@3.285,29.25 D1_W3.1@3.285,29.856 ; v1(4.385,30.3) 4.385,29.9 4.341,29.856 D1_W3.1@3.285,29.856
  Bottom Layer w0.305: v1(4.385,30.3) 4.435,30.25 Q3_W3.G@4.435,29.6
NetD1_W3_2: D1_W3.2 R1_W3.2 | length 0.8
  Top Layer w0.406: D1_W3.2@2.31,30 2.385,29.925 R1_W3.2@2.385,29.25
NetD1_W4_1: D1_W4.1 Q3_W4.G R2_W4.2 | length 3
  Top Layer w0.406: D1_W4.1@3.316,14.95 3.341,14.925 D1_W4.1@3.341,14.806 ; R2_W4.2@3.341,14.2 D1_W4.1@3.341,14.806 ; v1(4.441,15.25) 4.441,14.85 4.398,14.806 D1_W4.1@3.341,14.806
  Bottom Layer w0.305: v1(4.441,15.25) 4.491,15.2 Q3_W4.G@4.491,14.55
NetD1_W4_2: D1_W4.2 R1_W4.2 | length 0.8
  Top Layer w0.406: D1_W4.2@2.366,14.95 2.441,14.875 R1_W4.2@2.441,14.2
NetD2_U1_1: D2_U1.1 Q2_U1.G R4_U1.2 | length 2
  Top Layer w0.406: R4_U1.2@27.3,14.175 D2_U1.1@27.3,15.075
  Bottom Layer w0.152: Q2_U1.G@26.4,14.55 Q2_U1.G@26.75,14.55
  Bottom Layer w0.406: Q2_U1.G@26.75,14.55 v1(27.3,15.1)
NetD2_U1_2: D2_U1.2 R3_U1.2 | length 1
  Top Layer w0.406: R3_U1.2@28.2,14.175 28.2,15.025 D2_U1.2@28.275,15.1
NetD2_U2_1: D2_U2.1 Q2_U2.G R4_U2.2 | length 2
  Top Layer w0.406: R4_U2.2@27.2,29.275 D2_U2.1@27.2,30.175
  Bottom Layer w0.152: Q2_U2.G@26.3,29.65 Q2_U2.G@26.65,29.65
  Bottom Layer w0.406: Q2_U2.G@26.65,29.65 v1(27.2,30.2)
NetD2_U2_2: D2_U2.2 R3_U2.2 | length 1
  Top Layer w0.406: R3_U2.2@28.1,29.275 28.1,30.125 D2_U2.2@28.175,30.2
NetD2_U3_1: D2_U3.1 Q2_U3.G R4_U3.2 | length 2
  Top Layer w0.406: D2_U3.1@3.485,16.025 R4_U3.2@3.485,16.925
  Bottom Layer w0.152: Q2_U3.G@4.035,16.55 Q2_U3.G@4.385,16.55
  Bottom Layer w0.406: v1(3.485,16) Q2_U3.G@4.035,16.55
NetD2_U3_2: D2_U3.2 R3_U3.2 | length 1
  Top Layer w0.406: D2_U3.2@2.51,16 2.585,16.075 R3_U3.2@2.585,16.925
NetD2_U4_1: D2_U4.1 Q2_U4.G R4_U4.2 | length 2
  Top Layer w0.406: D2_U4.1@3.541,0.975 R4_U4.2@3.541,1.875
  Bottom Layer w0.152: Q2_U4.G@4.091,1.5 Q2_U4.G@4.441,1.5
  Bottom Layer w0.406: v1(3.541,0.95) Q2_U4.G@4.091,1.5
NetD2_U4_2: D2_U4.2 R3_U4.2 | length 1
  Top Layer w0.406: D2_U4.2@2.566,0.95 2.641,1.025 R3_U4.2@2.641,1.875
NetD2_V1_1: D2_V1.1 Q2_V1.G R4_V1.2 | length 1.5
  Top Layer w0.406: R4_V1.2@29.075,9.7 29.075,9.75 29.344,10.019 29.344,10.218 29.801,10.675 D2_V1.1@30,10.675
  other v1: 29.9,10.65
NetD2_V1_2: D2_V1.2 R3_V1.2 | length 1.7
  Top Layer w0.406: R3_V1.2@28.975,8.8 29.075,8.8 29.094,8.819 29.094,9.044 29.508,9.044 30,9.536 D2_V1.2@30,9.725
NetD2_V2_1: D2_V2.1 Q2_V2.G R4_V2.2 | length 1.5
  Top Layer w0.406: R4_V2.2@28.975,24.8 28.975,24.85 29.244,25.119 29.244,25.318 29.701,25.775 D2_V2.1@29.9,25.775
  other v1: 29.8,25.75
NetD2_V2_2: D2_V2.2 R3_V2.2 | length 1.7
  Top Layer w0.406: R3_V2.2@28.875,23.9 28.975,23.9 28.994,23.919 28.994,24.144 29.408,24.144 29.9,24.636 D2_V2.2@29.9,24.825
NetD2_V3_1: D2_V3.1 Q2_V3.G R4_V3.2 | length 1.5
  Top Layer w0.406: D2_V3.1@0.785,20.425 0.983,20.425 1.441,20.882 1.441,21.081 1.71,21.35 R4_V3.2@1.71,21.4
  other v1: 0.885,20.45
NetD2_V3_2: D2_V3.2 R3_V3.2 | length 1.6
  Top Layer w0.406: D2_V3.2@0.785,21.375 0.908,21.375 0.908,21.701 1.148,21.941 1.162,21.941 1.502,22.281 1.691,22.281 1.71,22.3 R3_V3.2@1.81,22.3
NetD2_V4_1: D2_V4.1 Q2_V4.G R4_V4.2 | length 1.5
  Top Layer w0.406: D2_V4.1@0.841,5.375 1.04,5.375 1.497,5.832 1.497,6.031 1.766,6.3 R4_V4.2@1.766,6.35
  other v1: 0.941,5.4
NetD2_V4_2: D2_V4.2 R3_V4.2 | length 1.6
  Top Layer w0.406: D2_V4.2@0.841,6.325 0.841,6.566 1.146,6.871 1.199,6.871 1.554,7.226 1.554,7.231 1.747,7.231 1.766,7.25 R3_V4.2@1.866,7.25
NetD2_W1_1: D2_W1.1 Q2_W1.G R4_W1.2 | length 1
  Top Layer w0.406: v1(28.025,4.5) 28.025,5.35 R4_W1.2@28.1,5.425
NetD2_W1_2: D2_W1.2 R3_W1.2 | length 1
  Top Layer w0.406: R3_W1.2@28.9,5.425 28.975,5.35 D2_W1.2@28.975,4.5
NetD2_W2_1: D2_W2.1 Q2_W2.G R4_W2.2 | length 1
  Top Layer w0.406: v1(27.925,19.6) 27.925,20.45 R4_W2.2@28,20.525
NetD2_W2_2: D2_W2.2 R3_W2.2 | length 1
  Top Layer w0.406: R3_W2.2@28.8,20.525 28.875,20.45 D2_W2.2@28.875,19.6
NetD2_W3_1: D2_W3.1 Q2_W3.G R4_W3.2 | length 1
  Top Layer w0.406: R4_W3.2@2.685,25.675 2.76,25.75 v1(2.76,26.6)
NetD2_W3_2: D2_W3.2 R3_W3.2 | length 1
  Top Layer w0.406: D2_W3.2@1.81,26.6 1.81,25.75 R3_W3.2@1.885,25.675
NetD2_W4_1: D2_W4.1 Q2_W4.G R4_W4.2 | length 1
  Top Layer w0.406: R4_W4.2@2.741,10.625 2.816,10.7 v1(2.816,11.55)
NetD2_W4_2: D2_W4.2 R3_W4.2 | length 1
  Top Layer w0.406: D2_W4.2@1.866,11.55 1.866,10.7 R3_W4.2@1.941,10.625
NetD3_2: D3.2 L1.2 Q1_C1.9 | length 6.2
  Top Layer w0.254: v1(18.3,6.7) 18.251,6.7 18.551,7 18.581,6.97 19.82,6.97 Q1_C1.9@19.85,7
  Bottom Layer w0.254: L1.2@15.5,4.7 L1.2@15.821,4.7 ; L1.2@15.81,4.69 L1.2@15.821,4.7 ; L1.2@16.6,4.7 L1.2@16.5,4.7 L1.2@15.821,4.7 ; v1(18.3,6.7) 17.821,6.7 L1.2@15.821,4.7
  other v1: 15.9,4.4 16.4,4.4
NetIO_C1_1: IO_C1.1 Q1_C1.37 | length 3.4
  Top Layer w0.152: Q1_C1.37@26.075,11.725 26.075,12.111 25.934,12.251 25.934,13.134 26.3,13.5
  Top Layer w0.254: 26.3,13.5 IO_C1.1@26.3,14.9
NetIO_C2_1: IO_C2.1 Q1_C2.37 | length 3.4
  Top Layer w0.152: Q1_C2.37@25.975,26.825 25.975,27.148 25.879,27.244 25.879,27.67 25.847,27.702 25.847,27.751 25.834,27.763 25.834,28.187 25.879,28.231 25.879,28.279 26.2,28.6
  Top Layer w0.254: 26.2,28.6 IO_C2.1@26.2,30
NetIO_C3_1: IO_C3.1 Q1_C3.37 | length 3.4
  Top Layer w0.152: 4.485,17.6 4.85,17.966 4.85,18.888 4.71,19.029 Q1_C3.37@4.71,19.375
  Top Layer w0.254: IO_C3.1@4.485,16.2 4.485,17.6
NetIO_C4_1: IO_C4.1 Q1_C4.37 | length 3.4
  Top Layer w0.152: 4.541,2.596 4.907,2.962 4.907,3.838 4.766,3.979 Q1_C4.37@4.766,4.325
  Top Layer w0.254: IO_C4.1@4.541,1.15 4.541,2.596
NetQ1_C1_25: Q1_C1.25 R1_W1.1 R2_W1.1 | length 3.8
  Top Layer w0.406: Q1_C1.25@26.8,5.4 26.8,5 27.306,4.494 27.306,2.994 27.425,2.875 R1_W1.1@28.4,2.875
NetQ1_C1_28: Q1_C1.28 R3_W1.1 R4_W1.1 | length 2.4
  Top Layer w0.254: Q1_C1.28@26.8,7 27.244,7 27.869,6.375 R4_W1.1@28.1,6.275
  Top Layer w0.406: R4_W1.1@28.1,6.275 R3_W1.1@28.9,6.275
NetQ1_C1_29: Q1_C1.29 R1_V1.1 R2_V1.1 | length 2.4
  Top Layer w0.254: Q1_C1.29@26.8,7.5 26.83,7.47 27.755,7.47 R2_V1.1@28.125,7.1
  Top Layer w0.406: R2_V1.1@28.125,7.1 28.325,7.3 R1_V1.1@28.325,7.9
NetQ1_C1_32: Q1_C1.32 R3_V1.1 R4_V1.1 | length 2.4
  Top Layer w0.254: Q1_C1.32@26.8,9 27.825,9 28,8.825 28,8.775 27.85,8.625 v1(27.85,8.55)
  Top Layer w0.406: R3_V1.1@28,8.775 R3_V1.1@28.025,8.8 ; v1(28.025,9) 28.025,9.55 28,9.575 R4_V1.1@28.125,9.7
NetQ1_C1_33: Q1_C1.33 R1_U1.1 R2_U1.1 | length 2.6
  Top Layer w0.152: Q1_C1.33@26.8,9.5 26.822,9.522 27.3,9.522 27.596,9.818 27.596,10.229 27.8,10.229 R1_U1.1@27.8,10.55
  Top Layer w0.406: R1_U1.1@27.8,10.55 R2_U1.1@27.8,11.325
NetQ1_C1_36: Q1_C1.36 R3_U1.1 R4_U1.1 | length 3.2
  Top Layer w0.406: Q1_C1.36@26.8,11.1 26.8,11.414 27.143,11.757 27.143,12.011 27.144,12.012 27.144,12.638 27.143,12.639 27.143,12.707 27.3,12.864 R4_U1.1@27.3,13.225 R3_U1.1@28.2,13.225
NetQ1_C1_39: Q1_C1.39 RX_C1.1 | length 1.4
  Top Layer w0.152: RX_C1.1@25,13.1 RX_C1.1@25.075,13.025
  Top Layer w0.254: Q1_C1.39@25.075,11.725 RX_C1.1@25.075,13.025
NetQ1_C2_9: Q1_C2.9
NetQ1_C2_25: Q1_C2.25 R1_W2.1 R2_W2.1 | length 3.8
  Top Layer w0.406: Q1_C2.25@26.7,20.5 26.7,20.1 27.206,19.594 27.206,18.094 27.325,17.975 R1_W2.1@28.3,17.975
NetQ1_C2_28: Q1_C2.28 R3_W2.1 R4_W2.1 | length 2.4
  Top Layer w0.254: Q1_C2.28@26.7,22.1 27.144,22.1 27.769,21.475 R4_W2.1@28,21.375
  Top Layer w0.406: R4_W2.1@28,21.375 R3_W2.1@28.8,21.375
NetQ1_C2_29: Q1_C2.29 R1_V2.1 R2_V2.1 | length 2.4
  Top Layer w0.254: Q1_C2.29@26.7,22.6 26.73,22.57 27.655,22.57 R2_V2.1@28.025,22.2
  Top Layer w0.406: R2_V2.1@28.025,22.2 28.225,22.4 R1_V2.1@28.225,23
NetQ1_C2_32: Q1_C2.32 R3_V2.1 R4_V2.1 | length 2.9
  Top Layer w0.254: Q1_C2.32@26.7,24.1 27.725,24.1 27.775,24.05 27.9,23.925 27.9,23.875 27.975,23.8 v1(27.926,23.8)
  Top Layer w0.406: v1(27.425,24) 27.675,24 27.7,23.975 27.775,24.05 R3_V2.1@27.85,24.05 ; R3_V2.1@27.9,23.875 R3_V2.1@27.925,23.9 ; R3_V2.1@27.925,24.1 27.875,24.05 R3_V2.1@27.85,24.05 ; R4_V2.1@28.025,24.8 28.025,24.225 R3_V2.1@27.85,24.05
NetQ1_C2_33: Q1_C2.33 R1_U2.1 R2_U2.1 | length 2.6
  Top Layer w0.152: Q1_C2.33@26.7,24.6 26.722,24.622 27.2,24.622 27.496,24.918 27.496,25.329 27.7,25.329 R1_U2.1@27.7,25.65
  Top Layer w0.406: R1_U2.1@27.7,25.65 R2_U2.1@27.7,26.425
NetQ1_C2_36: Q1_C2.36 R3_U2.1 R4_U2.1 | length 3.2
  Top Layer w0.406: Q1_C2.36@26.7,26.2 26.7,26.514 27.043,26.857 27.044,26.856 27.044,27.808 27.2,27.964 R4_U2.1@27.2,28.325 R3_U2.1@28.1,28.325
NetQ1_C2_39: Q1_C2.39 RX_C2.1 | length 1.4
  Top Layer w0.152: RX_C2.1@24.9,28.2 RX_C2.1@24.975,28.125
  Top Layer w0.254: Q1_C2.39@24.975,26.825 RX_C2.1@24.975,28.125
NetQ1_C3_9: Q1_C3.9
NetQ1_C3_25: Q1_C3.25 R1_W3.1 R2_W3.1 | length 3.8
  Top Layer w0.406: R1_W3.1@2.385,28.225 3.36,28.225 3.479,28.106 3.479,26.606 3.985,26.1 Q1_C3.25@3.985,25.7
NetQ1_C3_28: Q1_C3.28 R3_W3.1 R4_W3.1 | length 2.4
  Top Layer w0.254: R4_W3.1@2.685,24.825 2.916,24.725 3.541,24.1 Q1_C3.28@3.985,24.1
  Top Layer w0.406: R3_W3.1@1.885,24.825 R4_W3.1@2.685,24.825
NetQ1_C3_29: Q1_C3.29 R1_V3.1 R2_V3.1 | length 2.4
  Top Layer w0.254: R2_V3.1@2.66,24 3.03,23.63 3.955,23.63 Q1_C3.29@3.985,23.6
  Top Layer w0.406: R1_V3.1@2.46,23.2 2.46,23.8 R2_V3.1@2.66,24
NetQ1_C3_32: Q1_C3.32 R3_V3.1 R4_V3.1 | length 2.5
  Top Layer w0.254: v1(3.06,22.6) 2.785,22.325 2.785,22.275 2.96,22.1 Q1_C3.32@3.985,22.1
  Top Layer w0.406: R4_V3.1@2.66,21.4 2.785,21.525 v1(2.785,22.1) R3_V3.1@2.76,22.1 ; R3_V3.1@2.76,22.3 R3_V3.1@2.785,22.325
NetQ1_C3_33: Q1_C3.33 R1_U3.1 R2_U3.1 | length 2.6
  Top Layer w0.152: R1_U3.1@2.985,20.55 2.985,20.871 3.189,20.871 3.189,21.282 3.485,21.578 3.963,21.578 Q1_C3.33@3.985,21.6
  Top Layer w0.406: R2_U3.1@2.985,19.775 R1_U3.1@2.985,20.55
NetQ1_C3_36: Q1_C3.36 R3_U3.1 R4_U3.1 | length 3.2
  Top Layer w0.406: R3_U3.1@2.585,17.875 R4_U3.1@3.485,17.875 3.485,18.236 3.641,18.393 3.641,19.343 3.985,19.686 Q1_C3.36@3.985,20
NetQ1_C3_39: Q1_C3.39 RX_C3.1 | length 1.4
  Top Layer w0.152: RX_C3.1@5.71,18.075 RX_C3.1@5.785,18
  Top Layer w0.254: RX_C3.1@5.71,18.075 Q1_C3.39@5.71,19.375
NetQ1_C4_9: Q1_C4.9
NetQ1_C4_25: Q1_C4.25 R1_W4.1 R2_W4.1 | length 3.8
  Top Layer w0.406: R1_W4.1@2.441,13.175 3.416,13.175 3.535,13.056 3.535,11.556 4.041,11.05 Q1_C4.25@4.041,10.65
NetQ1_C4_28: Q1_C4.28 R3_W4.1 R4_W4.1 | length 2.4
  Top Layer w0.254: R4_W4.1@2.741,9.775 2.973,9.675 3.598,9.05 Q1_C4.28@4.041,9.05
  Top Layer w0.406: R3_W4.1@1.941,9.775 R4_W4.1@2.741,9.775
NetQ1_C4_29: Q1_C4.29 R1_V4.1 R2_V4.1 | length 2.4
  Top Layer w0.254: R2_V4.1@2.716,8.95 3.087,8.58 4.012,8.58 Q1_C4.29@4.041,8.55
  Top Layer w0.406: R1_V4.1@2.516,8.15 2.516,8.75 R2_V4.1@2.716,8.95
NetQ1_C4_32: Q1_C4.32 R3_V4.1 R4_V4.1 | length 2.5
  Top Layer w0.254: v1(3.066,7.5) 2.841,7.275 2.841,7.225 3.016,7.05 Q1_C4.32@4.041,7.05
  Top Layer w0.406: R4_V4.1@2.716,6.35 2.841,6.475 v1(2.841,7.05) R3_V4.1@2.816,7.05 ; R3_V4.1@2.816,7.25 R3_V4.1@2.841,7.275
NetQ1_C4_33: Q1_C4.33 R1_U4.1 R2_U4.1 | length 2.6
  Top Layer w0.152: R1_U4.1@3.041,5.5 3.041,5.821 3.245,5.821 3.245,6.232 3.541,6.528 4.02,6.528 Q1_C4.33@4.041,6.55
  Top Layer w0.406: R2_U4.1@3.041,4.725 R1_U4.1@3.041,5.5
NetQ1_C4_36: Q1_C4.36 R3_U4.1 R4_U4.1 | length 3.2
  Top Layer w0.406: R3_U4.1@2.641,2.825 R4_U4.1@3.541,2.825 3.541,3.186 3.698,3.343 3.698,4.293 4.041,4.636 Q1_C4.36@4.041,4.95
NetQ1_C4_39: Q1_C4.39 RX_C4.1 | length 1.4
  Top Layer w0.152: RX_C4.1@5.766,3.025 RX_C4.1@5.841,2.95
  Top Layer w0.254: RX_C4.1@5.766,3.025 Q1_C4.39@5.766,4.325
NetQ2_U1_S: Q2_U1.S R5_U1.2 R18_U1.1 | length 0.8
  Top Layer w0.254: R5_U1.2@22.8,14.975 R5_U1.2@22.825,15
  Top Layer w0.406: R18_U1.1@22.8,14.25 R5_U1.2@22.8,14.975
  other v1: 26.538,12.325 26.5,12.775 22.575,14.7 23.2,14.7 23.275,15.2 22.5,15.225
NetQ2_U2_S: Q2_U2.S R5_U2.2 R18_U2.1 | length 0.8
  Top Layer w0.254: R5_U2.2@22.7,30.075 R5_U2.2@22.725,30.1
  Top Layer w0.406: R18_U2.1@22.7,29.35 R5_U2.2@22.7,30.075
  other v1: 26.425,27.45 26.326,27.901 22.4,29.8 23.1,29.8 22.4,30.325 23.125,30.325